# EAGLE board 13519-Serial-Basic.panel_v10 (EAGLE 7.5.0), part 1 of 6
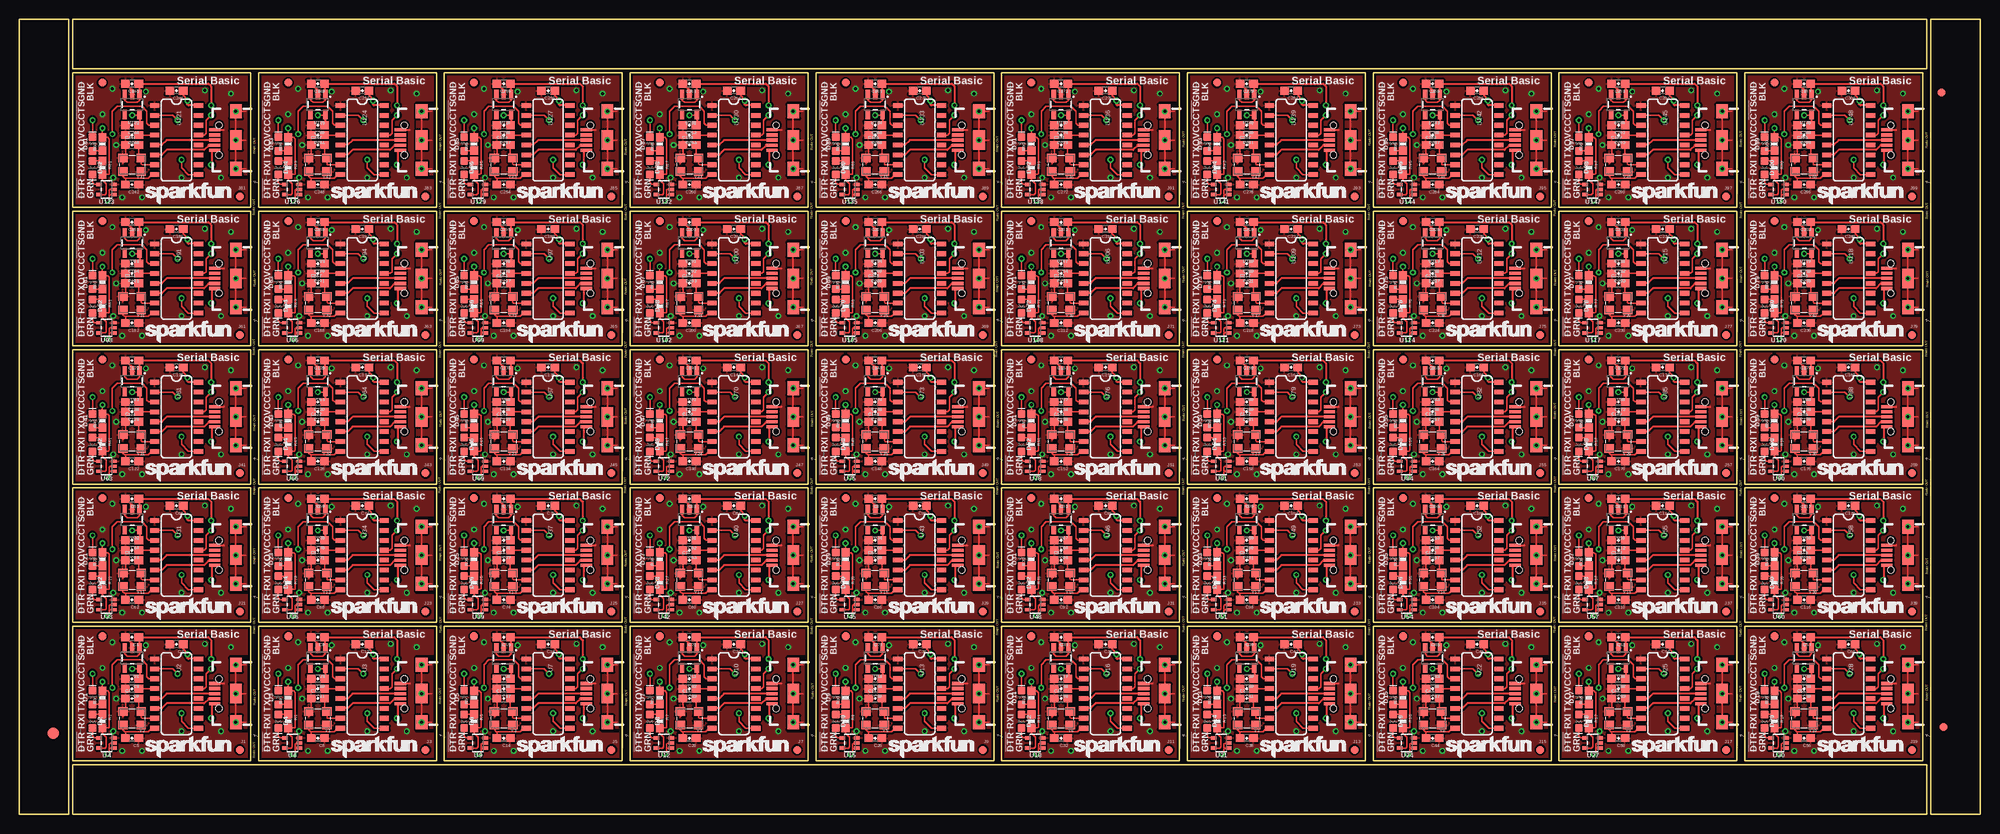
[diagram p0: board, top side]
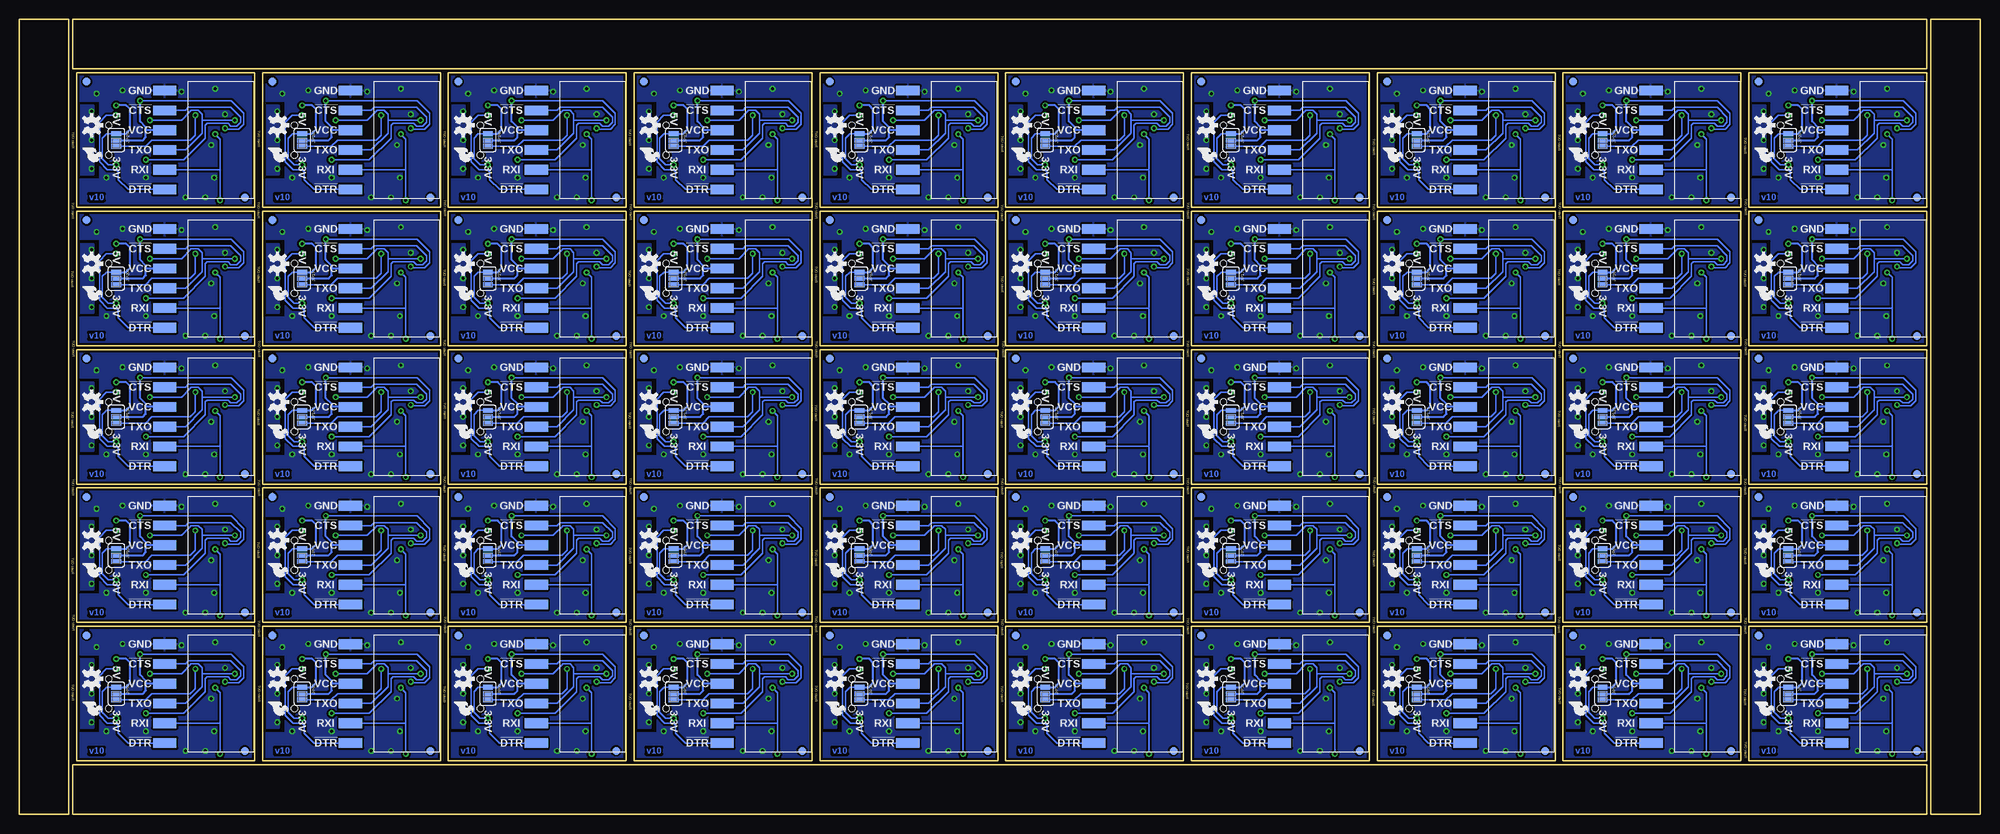
[diagram p1: board, bottom side, seen from below]

Size 251.97 x 102.11 mm. Coordinates in mm from the lower left corner, seen from the top.
Outline: 224 segments
Copper layers (1*16): Top 0.035mm / dielectric 1.5mm / Bottom 0.035mm
Design rules "SparkFun-2-layer-TIGHT": minimum track width 7mil, minimum drill 15mil, track to track 7mil, track to pad 7mil, pad to pad 7mil, via to via 7mil, smd to smd 7mil, copper to edge 7mil, drill to drill 7mil, minimum pad ring 7mil, minimum via ring 7mil, stop-mask expansion 4mil, vias tented up to drill 20mil, thermal gap 10mil
Net classes: 1 power: width 0.178 mm

## Footprints (pad centres in the part's own frame; a part is rotated, then mirrored left to right if it is on the bottom)
0603-CAP = smd 1.1 x 1: 1 -0.85,0; 2 0.85,0
LED-0603 = smd 1 x 1: A -0.877,0; C 0.877,0
FIDUCIAL-1.5X3 = smd 1.5 x 1.5: 1 0,0
FIDUCIAL-1X2 = smd 1 x 1: 1 0,0
USB-B-MICRO-SMD_V03 = smd 1.45 x 0.4: D+ 2.725,0; D- 2.725,0.65; GND 2.725,-1.3; ID 2.725,-0.65; VBUS 2.725,1.3 | smd 1.5 x 1.8: SHIELD1 0,3.685; SHIELD2 0,-3.685 | smd 1.5 x 2.5: SHIELD3 0,0 | hole 0.85: 2.2,1.9; 2.2,-1.9
1X06-SMD-FEMALE-V2 = smd 1.25 x 3: 1 6.35,3.425; 2 3.81,3.425; 3 1.27,3.425; 4 -1.27,3.425; 5 -3.81,3.425; 6 -6.35,3.425
PAD-JUMPER-3-2OF3_NC_BY_PASTE_YES_SILK_FULL_BOX = smd 0.635 x 1.27: 1 -0.813,0; 2 0,0; 3 0.813,0
0603-RES = smd 1.1 x 1: 1 -0.85,0; 2 0.85,0
SOT23-5 = smd 0.55 x 1.2: 1 -0.95,-1.3; 2 0,-1.3; 3 0.95,-1.3; 4 0.95,1.3; 5 -0.95,1.3
SO016 = smd 0.6 x 1.2: 1 -4.445,-2.8; 2 -3.175,-2.8; 3 -1.905,-2.8; 4 -0.635,-2.8; 5 0.635,-2.8; 6 1.905,-2.8; 7 3.175,-2.8; 8 4.445,-2.8; 9 4.445,2.8; 10 3.175,2.8; 11 1.905,2.8; 12 0.635,2.8; 13 -0.635,2.8; 14 -1.905,2.8; 15 -3.175,2.8; 16 -4.445,2.8
SOT353 = smd 0.42 x 0.7: 1 -0.65,-0.95; 2 0,-0.95; 3 0.65,-0.95; 4 0.65,0.95; 5 -0.65,0.95
CRYSTAL-SMD-3.2X2.5 = smd 1.2 x 1.1: 1 -1.175,-0.875; 2 1.175,-0.875; 3 1.175,0.875; 4 -1.175,0.875

## Placement (x,y rotation side)
C1  1.0uF  [0603-CAP]  14.48,22.73 180 top
C2  1.0uF  [0603-CAP]  14.48,17.4 180 top
C3  0.1uF  [0603-CAP]  20.19,21.84 180 top
C4  10pF  [0603-CAP]  14.48,14.86 0 top
C5  10pF  [0603-CAP]  14.48,9.78 180 top
C6  10nF  [0603-CAP]  14.48,16.13 180 top
C7  10pF  [0603-CAP]  38.35,14.86 0 top
C8  10pF  [0603-CAP]  38.35,9.78 180 top
C9  1.0uF  [0603-CAP]  38.35,22.73 180 top
C10  1.0uF  [0603-CAP]  38.35,17.4 180 top
C11  10nF  [0603-CAP]  38.35,16.13 180 top
C12  0.1uF  [0603-CAP]  44.07,21.84 180 top
C13  10pF  [0603-CAP]  62.23,14.86 0 top
C14  10pF  [0603-CAP]  62.23,9.78 180 top
C15  1.0uF  [0603-CAP]  62.23,22.73 180 top
C16  1.0uF  [0603-CAP]  62.23,17.4 180 top
C17  10nF  [0603-CAP]  62.23,16.13 180 top
C18  0.1uF  [0603-CAP]  67.94,21.84 180 top
C19  10pF  [0603-CAP]  86.11,14.86 0 top
C20  10pF  [0603-CAP]  86.11,9.78 180 top
C21  1.0uF  [0603-CAP]  86.11,22.73 180 top
C22  1.0uF  [0603-CAP]  86.11,17.4 180 top
C23  10nF  [0603-CAP]  86.11,16.13 180 top
C24  0.1uF  [0603-CAP]  91.82,21.84 180 top
C25  10pF  [0603-CAP]  109.98,14.86 0 top
C26  10pF  [0603-CAP]  109.98,9.78 180 top
C27  1.0uF  [0603-CAP]  109.98,22.73 180 top
C28  1.0uF  [0603-CAP]  109.98,17.4 180 top
C29  10nF  [0603-CAP]  109.98,16.13 180 top
C30  0.1uF  [0603-CAP]  115.7,21.84 180 top
C31  10pF  [0603-CAP]  133.86,14.86 0 top
C32  10pF  [0603-CAP]  133.86,9.78 180 top
C33  1.0uF  [0603-CAP]  133.86,22.73 180 top
C34  1.0uF  [0603-CAP]  133.86,17.4 180 top
C35  10nF  [0603-CAP]  133.86,16.13 180 top
C36  0.1uF  [0603-CAP]  139.57,21.84 180 top
C37  10pF  [0603-CAP]  157.73,14.86 0 top
C38  10pF  [0603-CAP]  157.73,9.78 180 top
C39  1.0uF  [0603-CAP]  157.73,22.73 180 top
C40  1.0uF  [0603-CAP]  157.73,17.4 180 top
C41  10nF  [0603-CAP]  157.73,16.13 180 top
C42  0.1uF  [0603-CAP]  163.45,21.84 180 top
C43  10pF  [0603-CAP]  181.61,14.86 0 top
C44  10pF  [0603-CAP]  181.61,9.78 180 top
C45  1.0uF  [0603-CAP]  181.61,22.73 180 top
C46  1.0uF  [0603-CAP]  181.61,17.4 180 top
C47  10nF  [0603-CAP]  181.61,16.13 180 top
C48  0.1uF  [0603-CAP]  187.32,21.84 180 top
C49  10pF  [0603-CAP]  205.49,14.86 0 top
C50  10pF  [0603-CAP]  205.49,9.78 180 top
C51  1.0uF  [0603-CAP]  205.49,22.73 180 top
C52  1.0uF  [0603-CAP]  205.49,17.4 180 top
C53  10nF  [0603-CAP]  205.49,16.13 180 top
C54  0.1uF  [0603-CAP]  211.2,21.84 180 top
C55  10pF  [0603-CAP]  229.36,14.86 0 top
C56  10pF  [0603-CAP]  229.36,9.78 180 top
C57  1.0uF  [0603-CAP]  229.36,22.73 180 top
C58  1.0uF  [0603-CAP]  229.36,17.4 180 top
C59  10nF  [0603-CAP]  229.36,16.13 180 top
C60  0.1uF  [0603-CAP]  235.08,21.84 180 top
C61  10pF  [0603-CAP]  14.48,32.64 0 top
C62  10pF  [0603-CAP]  14.48,27.56 180 top
C63  1.0uF  [0603-CAP]  14.48,40.51 180 top
C64  1.0uF  [0603-CAP]  14.48,35.18 180 top
C65  10nF  [0603-CAP]  14.48,33.91 180 top
C66  0.1uF  [0603-CAP]  20.19,39.62 180 top
C67  10pF  [0603-CAP]  38.35,32.64 0 top
C68  10pF  [0603-CAP]  38.35,27.56 180 top
C69  1.0uF  [0603-CAP]  38.35,40.51 180 top
C70  1.0uF  [0603-CAP]  38.35,35.18 180 top
C71  10nF  [0603-CAP]  38.35,33.91 180 top
C72  0.1uF  [0603-CAP]  44.07,39.62 180 top
C73  10pF  [0603-CAP]  62.23,32.64 0 top
C74  10pF  [0603-CAP]  62.23,27.56 180 top
C75  1.0uF  [0603-CAP]  62.23,40.51 180 top
C76  1.0uF  [0603-CAP]  62.23,35.18 180 top
C77  10nF  [0603-CAP]  62.23,33.91 180 top
C78  0.1uF  [0603-CAP]  67.94,39.62 180 top
C79  10pF  [0603-CAP]  86.11,32.64 0 top
C80  10pF  [0603-CAP]  86.11,27.56 180 top
C81  1.0uF  [0603-CAP]  86.11,40.51 180 top
C82  1.0uF  [0603-CAP]  86.11,35.18 180 top
C83  10nF  [0603-CAP]  86.11,33.91 180 top
C84  0.1uF  [0603-CAP]  91.82,39.62 180 top
C85  10pF  [0603-CAP]  109.98,32.64 0 top
C86  10pF  [0603-CAP]  109.98,27.56 180 top
C87  1.0uF  [0603-CAP]  109.98,40.51 180 top
C88  1.0uF  [0603-CAP]  109.98,35.18 180 top
C89  10nF  [0603-CAP]  109.98,33.91 180 top
C90  0.1uF  [0603-CAP]  115.7,39.62 180 top
C91  10pF  [0603-CAP]  133.86,32.64 0 top
C92  10pF  [0603-CAP]  133.86,27.56 180 top
C93  1.0uF  [0603-CAP]  133.86,40.51 180 top
C94  1.0uF  [0603-CAP]  133.86,35.18 180 top
C95  10nF  [0603-CAP]  133.86,33.91 180 top
C96  0.1uF  [0603-CAP]  139.57,39.62 180 top
C97  10pF  [0603-CAP]  157.73,32.64 0 top
C98  10pF  [0603-CAP]  157.73,27.56 180 top
C99  1.0uF  [0603-CAP]  157.73,40.51 180 top
C100  1.0uF  [0603-CAP]  157.73,35.18 180 top
C101  10nF  [0603-CAP]  157.73,33.91 180 top
C102  0.1uF  [0603-CAP]  163.45,39.62 180 top
C103  10pF  [0603-CAP]  181.61,32.64 0 top
C104  10pF  [0603-CAP]  181.61,27.56 180 top
C105  1.0uF  [0603-CAP]  181.61,40.51 180 top
C106  1.0uF  [0603-CAP]  181.61,35.18 180 top
C107  10nF  [0603-CAP]  181.61,33.91 180 top
C108  0.1uF  [0603-CAP]  187.32,39.62 180 top
C109  10pF  [0603-CAP]  205.49,32.64 0 top
C110  10pF  [0603-CAP]  205.49,27.56 180 top
C111  1.0uF  [0603-CAP]  205.49,40.51 180 top
C112  1.0uF  [0603-CAP]  205.49,35.18 180 top
C113  10nF  [0603-CAP]  205.49,33.91 180 top
C114  0.1uF  [0603-CAP]  211.2,39.62 180 top
C115  10pF  [0603-CAP]  229.36,32.64 0 top
C116  10pF  [0603-CAP]  229.36,27.56 180 top
C117  1.0uF  [0603-CAP]  229.36,40.51 180 top
C118  1.0uF  [0603-CAP]  229.36,35.18 180 top
C119  10nF  [0603-CAP]  229.36,33.91 180 top
C120  0.1uF  [0603-CAP]  235.08,39.62 180 top
C121  10pF  [0603-CAP]  14.48,50.42 0 top
C122  10pF  [0603-CAP]  14.48,45.34 180 top
C123  1.0uF  [0603-CAP]  14.48,58.29 180 top
C124  1.0uF  [0603-CAP]  14.48,52.96 180 top
C125  10nF  [0603-CAP]  14.48,51.69 180 top
C126  0.1uF  [0603-CAP]  20.19,57.4 180 top
C127  10pF  [0603-CAP]  38.35,50.42 0 top
C128  10pF  [0603-CAP]  38.35,45.34 180 top
C129  1.0uF  [0603-CAP]  38.35,58.29 180 top
C130  1.0uF  [0603-CAP]  38.35,52.96 180 top
C131  10nF  [0603-CAP]  38.35,51.69 180 top
C132  0.1uF  [0603-CAP]  44.07,57.4 180 top
C133  10pF  [0603-CAP]  62.23,50.42 0 top
C134  10pF  [0603-CAP]  62.23,45.34 180 top
C135  1.0uF  [0603-CAP]  62.23,58.29 180 top
C136  1.0uF  [0603-CAP]  62.23,52.96 180 top
C137  10nF  [0603-CAP]  62.23,51.69 180 top
C138  0.1uF  [0603-CAP]  67.94,57.4 180 top
C139  10pF  [0603-CAP]  86.11,50.42 0 top
C140  10pF  [0603-CAP]  86.11,45.34 180 top
C141  1.0uF  [0603-CAP]  86.11,58.29 180 top
C142  1.0uF  [0603-CAP]  86.11,52.96 180 top
C143  10nF  [0603-CAP]  86.11,51.69 180 top
C144  0.1uF  [0603-CAP]  91.82,57.4 180 top
C145  10pF  [0603-CAP]  109.98,50.42 0 top
C146  10pF  [0603-CAP]  109.98,45.34 180 top
C147  1.0uF  [0603-CAP]  109.98,58.29 180 top
C148  1.0uF  [0603-CAP]  109.98,52.96 180 top
C149  10nF  [0603-CAP]  109.98,51.69 180 top
C150  0.1uF  [0603-CAP]  115.7,57.4 180 top
C151  10pF  [0603-CAP]  133.86,50.42 0 top
C152  10pF  [0603-CAP]  133.86,45.34 180 top
C153  1.0uF  [0603-CAP]  133.86,58.29 180 top
C154  1.0uF  [0603-CAP]  133.86,52.96 180 top
C155  10nF  [0603-CAP]  133.86,51.69 180 top
C156  0.1uF  [0603-CAP]  139.57,57.4 180 top
C157  10pF  [0603-CAP]  157.73,50.42 0 top
C158  10pF  [0603-CAP]  157.73,45.34 180 top
C159  1.0uF  [0603-CAP]  157.73,58.29 180 top
C160  1.0uF  [0603-CAP]  157.73,52.96 180 top
C161  10nF  [0603-CAP]  157.73,51.69 180 top
C162  0.1uF  [0603-CAP]  163.45,57.4 180 top
C163  10pF  [0603-CAP]  181.61,50.42 0 top
C164  10pF  [0603-CAP]  181.61,45.34 180 top
C165  1.0uF  [0603-CAP]  181.61,58.29 180 top
C166  1.0uF  [0603-CAP]  181.61,52.96 180 top
C167  10nF  [0603-CAP]  181.61,51.69 180 top
C168  0.1uF  [0603-CAP]  187.32,57.4 180 top
C169  10pF  [0603-CAP]  205.49,50.42 0 top
C170  10pF  [0603-CAP]  205.49,45.34 180 top
C171  1.0uF  [0603-CAP]  205.49,58.29 180 top
C172  1.0uF  [0603-CAP]  205.49,52.96 180 top
C173  10nF  [0603-CAP]  205.49,51.69 180 top
C174  0.1uF  [0603-CAP]  211.2,57.4 180 top
C175  10pF  [0603-CAP]  229.36,50.42 0 top
C176  10pF  [0603-CAP]  229.36,45.34 180 top
C177  1.0uF  [0603-CAP]  229.36,58.29 180 top
C178  1.0uF  [0603-CAP]  229.36,52.96 180 top
C179  10nF  [0603-CAP]  229.36,51.69 180 top
C180  0.1uF  [0603-CAP]  235.08,57.4 180 top
C181  10pF  [0603-CAP]  14.48,68.2 0 top
C182  10pF  [0603-CAP]  14.48,63.12 180 top
C183  1.0uF  [0603-CAP]  14.48,76.07 180 top
C184  1.0uF  [0603-CAP]  14.48,70.74 180 top
C185  10nF  [0603-CAP]  14.48,69.47 180 top
C186  0.1uF  [0603-CAP]  20.19,75.18 180 top
C187  10pF  [0603-CAP]  38.35,68.2 0 top
C188  10pF  [0603-CAP]  38.35,63.12 180 top
C189  1.0uF  [0603-CAP]  38.35,76.07 180 top
C190  1.0uF  [0603-CAP]  38.35,70.74 180 top
C191  10nF  [0603-CAP]  38.35,69.47 180 top
C192  0.1uF  [0603-CAP]  44.07,75.18 180 top
C193  10pF  [0603-CAP]  62.23,68.2 0 top
C194  10pF  [0603-CAP]  62.23,63.12 180 top
C195  1.0uF  [0603-CAP]  62.23,76.07 180 top
C196  1.0uF  [0603-CAP]  62.23,70.74 180 top
C197  10nF  [0603-CAP]  62.23,69.47 180 top
C198  0.1uF  [0603-CAP]  67.94,75.18 180 top
C199  10pF  [0603-CAP]  86.11,68.2 0 top
C200  10pF  [0603-CAP]  86.11,63.12 180 top
C201  1.0uF  [0603-CAP]  86.11,76.07 180 top
C202  1.0uF  [0603-CAP]  86.11,70.74 180 top
C203  10nF  [0603-CAP]  86.11,69.47 180 top
C204  0.1uF  [0603-CAP]  91.82,75.18 180 top
C205  10pF  [0603-CAP]  109.98,68.2 0 top
C206  10pF  [0603-CAP]  109.98,63.12 180 top
C207  1.0uF  [0603-CAP]  109.98,76.07 180 top
C208  1.0uF  [0603-CAP]  109.98,70.74 180 top
C209  10nF  [0603-CAP]  109.98,69.47 180 top
C210  0.1uF  [0603-CAP]  115.7,75.18 180 top
C211  10pF  [0603-CAP]  133.86,68.2 0 top
C212  10pF  [0603-CAP]  133.86,63.12 180 top
C213  1.0uF  [0603-CAP]  133.86,76.07 180 top
C214  1.0uF  [0603-CAP]  133.86,70.74 180 top
C215  10nF  [0603-CAP]  133.86,69.47 180 top
C216  0.1uF  [0603-CAP]  139.57,75.18 180 top
C217  10pF  [0603-CAP]  157.73,68.2 0 top
C218  10pF  [0603-CAP]  157.73,63.12 180 top
C219  1.0uF  [0603-CAP]  157.73,76.07 180 top
C220  1.0uF  [0603-CAP]  157.73,70.74 180 top
C221  10nF  [0603-CAP]  157.73,69.47 180 top
C222  0.1uF  [0603-CAP]  163.45,75.18 180 top
C223  10pF  [0603-CAP]  181.61,68.2 0 top
C224  10pF  [0603-CAP]  181.61,63.12 180 top
C225  1.0uF  [0603-CAP]  181.61,76.07 180 top
C226  1.0uF  [0603-CAP]  181.61,70.74 180 top
C227  10nF  [0603-CAP]  181.61,69.47 180 top
C228  0.1uF  [0603-CAP]  187.32,75.18 180 top
C229  10pF  [0603-CAP]  205.49,68.2 0 top
C230  10pF  [0603-CAP]  205.49,63.12 180 top
C231  1.0uF  [0603-CAP]  205.49,76.07 180 top
C232  1.0uF  [0603-CAP]  205.49,70.74 180 top
C233  10nF  [0603-CAP]  205.49,69.47 180 top
C234  0.1uF  [0603-CAP]  211.2,75.18 180 top
C235  10pF  [0603-CAP]  229.36,68.2 0 top
C236  10pF  [0603-CAP]  229.36,63.12 180 top
C237  1.0uF  [0603-CAP]  229.36,76.07 180 top
C238  1.0uF  [0603-CAP]  229.36,70.74 180 top
C239  10nF  [0603-CAP]  229.36,69.47 180 top
C240  0.1uF  [0603-CAP]  235.08,75.18 180 top
C241  10pF  [0603-CAP]  14.48,85.98 0 top
C242  10pF  [0603-CAP]  14.48,80.9 180 top
C243  1.0uF  [0603-CAP]  14.48,93.85 180 top
C244  1.0uF  [0603-CAP]  14.48,88.52 180 top
C245  10nF  [0603-CAP]  14.48,87.25 180 top
C246  0.1uF  [0603-CAP]  20.19,92.96 180 top
C247  10pF  [0603-CAP]  38.35,85.98 0 top
C248  10pF  [0603-CAP]  38.35,80.9 180 top
C249  1.0uF  [0603-CAP]  38.35,93.85 180 top
C250  1.0uF  [0603-CAP]  38.35,88.52 180 top
C251  10nF  [0603-CAP]  38.35,87.25 180 top
C252  0.1uF  [0603-CAP]  44.07,92.96 180 top
C253  10pF  [0603-CAP]  62.23,85.98 0 top
C254  10pF  [0603-CAP]  62.23,80.9 180 top
C255  1.0uF  [0603-CAP]  62.23,93.85 180 top
C256  1.0uF  [0603-CAP]  62.23,88.52 180 top
C257  10nF  [0603-CAP]  62.23,87.25 180 top
C258  0.1uF  [0603-CAP]  67.94,92.96 180 top
C259  10pF  [0603-CAP]  86.11,85.98 0 top
C260  10pF  [0603-CAP]  86.11,80.9 180 top
C261  1.0uF  [0603-CAP]  86.11,93.85 180 top
C262  1.0uF  [0603-CAP]  86.11,88.52 180 top
C263  10nF  [0603-CAP]  86.11,87.25 180 top
C264  0.1uF  [0603-CAP]  91.82,92.96 180 top
C265  10pF  [0603-CAP]  109.98,85.98 0 top
C266  10pF  [0603-CAP]  109.98,80.9 180 top
C267  1.0uF  [0603-CAP]  109.98,93.85 180 top
C268  1.0uF  [0603-CAP]  109.98,88.52 180 top
C269  10nF  [0603-CAP]  109.98,87.25 180 top
C270  0.1uF  [0603-CAP]  115.7,92.96 180 top
C271  10pF  [0603-CAP]  133.86,85.98 0 top
C272  10pF  [0603-CAP]  133.86,80.9 180 top
C273  1.0uF  [0603-CAP]  133.86,93.85 180 top
C274  1.0uF  [0603-CAP]  133.86,88.52 180 top
C275  10nF  [0603-CAP]  133.86,87.25 180 top
C276  0.1uF  [0603-CAP]  139.57,92.96 180 top
C277  10pF  [0603-CAP]  157.73,85.98 0 top
C278  10pF  [0603-CAP]  157.73,80.9 180 top
C279  1.0uF  [0603-CAP]  157.73,93.85 180 top
C280  1.0uF  [0603-CAP]  157.73,88.52 180 top
C281  10nF  [0603-CAP]  157.73,87.25 180 top
C282  0.1uF  [0603-CAP]  163.45,92.96 180 top
C283  10pF  [0603-CAP]  181.61,85.98 0 top
C284  10pF  [0603-CAP]  181.61,80.9 180 top
C285  1.0uF  [0603-CAP]  181.61,93.85 180 top
C286  1.0uF  [0603-CAP]  181.61,88.52 180 top
C287  10nF  [0603-CAP]  181.61,87.25 180 top
C288  0.1uF  [0603-CAP]  187.32,92.96 180 top
C289  10pF  [0603-CAP]  205.49,85.98 0 top
C290  10pF  [0603-CAP]  205.49,80.9 180 top
C291  1.0uF  [0603-CAP]  205.49,93.85 180 top
C292  1.0uF  [0603-CAP]  205.49,88.52 180 top
C293  10nF  [0603-CAP]  205.49,87.25 180 top
C294  0.1uF  [0603-CAP]  211.2,92.96 180 top
C295  10pF  [0603-CAP]  229.36,85.98 0 top
C296  10pF  [0603-CAP]  229.36,80.9 180 top
C297  1.0uF  [0603-CAP]  229.36,93.85 180 top
C298  1.0uF  [0603-CAP]  229.36,88.52 180 top
C299  10nF  [0603-CAP]  229.36,87.25 180 top
C300  0.1uF  [0603-CAP]  235.08,92.96 180 top
D1  GREEN  [LED-0603]  9.4,14.99 90 top
D2  Yellow  [LED-0603]  9.4,11.94 270 top
D3  GREEN  [LED-0603]  33.27,14.99 90 top
D4  Yellow  [LED-0603]  33.27,11.94 270 top
D5  GREEN  [LED-0603]  57.15,14.99 90 top
D6  Yellow  [LED-0603]  57.15,11.94 270 top
D7  GREEN  [LED-0603]  81.03,14.99 90 top
D8  Yellow  [LED-0603]  81.03,11.94 270 top
D9  GREEN  [LED-0603]  104.9,14.99 90 top
D10  Yellow  [LED-0603]  104.9,11.94 270 top
D11  GREEN  [LED-0603]  128.78,14.99 90 top
D12  Yellow  [LED-0603]  128.78,11.94 270 top
D13  GREEN  [LED-0603]  152.65,14.99 90 top
D14  Yellow  [LED-0603]  152.65,11.94 270 top
D15  GREEN  [LED-0603]  176.53,14.99 90 top
D16  Yellow  [LED-0603]  176.53,11.94 270 top
D17  GREEN  [LED-0603]  200.41,14.99 90 top
D18  Yellow  [LED-0603]  200.41,11.94 270 top
D19  GREEN  [LED-0603]  224.28,14.99 90 top
D20  Yellow  [LED-0603]  224.28,11.94 270 top
D21  GREEN  [LED-0603]  9.4,32.77 90 top
D22  Yellow  [LED-0603]  9.4,29.72 270 top
D23  GREEN  [LED-0603]  33.27,32.77 90 top
D24  Yellow  [LED-0603]  33.27,29.72 270 top
D25  GREEN  [LED-0603]  57.15,32.77 90 top
D26  Yellow  [LED-0603]  57.15,29.72 270 top
D27  GREEN  [LED-0603]  81.03,32.77 90 top
D28  Yellow  [LED-0603]  81.03,29.72 270 top
D29  GREEN  [LED-0603]  104.9,32.77 90 top
D30  Yellow  [LED-0603]  104.9,29.72 270 top
D31  GREEN  [LED-0603]  128.78,32.77 90 top
D32  Yellow  [LED-0603]  128.78,29.72 270 top
D33  GREEN  [LED-0603]  152.65,32.77 90 top
D34  Yellow  [LED-0603]  152.65,29.72 270 top
D35  GREEN  [LED-0603]  176.53,32.77 90 top
D36  Yellow  [LED-0603]  176.53,29.72 270 top
D37  GREEN  [LED-0603]  200.41,32.77 90 top
D38  Yellow  [LED-0603]  200.41,29.72 270 top
D39  GREEN  [LED-0603]  224.28,32.77 90 top
D40  Yellow  [LED-0603]  224.28,29.72 270 top
D41  GREEN  [LED-0603]  9.4,50.55 90 top
D42  Yellow  [LED-0603]  9.4,47.5 270 top
D43  GREEN  [LED-0603]  33.27,50.55 90 top
D44  Yellow  [LED-0603]  33.27,47.5 270 top
D45  GREEN  [LED-0603]  57.15,50.55 90 top
D46  Yellow  [LED-0603]  57.15,47.5 270 top
D47  GREEN  [LED-0603]  81.03,50.55 90 top
D48  Yellow  [LED-0603]  81.03,47.5 270 top
D49  GREEN  [LED-0603]  104.9,50.55 90 top
D50  Yellow  [LED-0603]  104.9,47.5 270 top
D51  GREEN  [LED-0603]  128.78,50.55 90 top
D52  Yellow  [LED-0603]  128.78,47.5 270 top
D53  GREEN  [LED-0603]  152.65,50.55 90 top
D54  Yellow  [LED-0603]  152.65,47.5 270 top
D55  GREEN  [LED-0603]  176.53,50.55 90 top
D56  Yellow  [LED-0603]  176.53,47.5 270 top
D57  GREEN  [LED-0603]  200.41,50.55 90 top
D58  Yellow  [LED-0603]  200.41,47.5 270 top
D59  GREEN  [LED-0603]  224.28,50.55 90 top
D60  Yellow  [LED-0603]  224.28,47.5 270 top
D61  GREEN  [LED-0603]  9.4,68.33 90 top
D62  Yellow  [LED-0603]  9.4,65.28 270 top
D63  GREEN  [LED-0603]  33.27,68.33 90 top
D64  Yellow  [LED-0603]  33.27,65.28 270 top
D65  GREEN  [LED-0603]  57.15,68.33 90 top
D66  Yellow  [LED-0603]  57.15,65.28 270 top
D67  GREEN  [LED-0603]  81.03,68.33 90 top
D68  Yellow  [LED-0603]  81.03,65.28 270 top
D69  GREEN  [LED-0603]  104.9,68.33 90 top
D70  Yellow  [LED-0603]  104.9,65.28 270 top
D71  GREEN  [LED-0603]  128.78,68.33 90 top
D72  Yellow  [LED-0603]  128.78,65.28 270 top
D73  GREEN  [LED-0603]  152.65,68.33 90 top
D74  Yellow  [LED-0603]  152.65,65.28 270 top
D75  GREEN  [LED-0603]  176.53,68.33 90 top
D76  Yellow  [LED-0603]  176.53,65.28 270 top
D77  GREEN  [LED-0603]  200.41,68.33 90 top
D78  Yellow  [LED-0603]  200.41,65.28 270 top
D79  GREEN  [LED-0603]  224.28,68.33 90 top
D80  Yellow  [LED-0603]  224.28,65.28 270 top
D81  GREEN  [LED-0603]  9.4,86.11 90 top
D82  Yellow  [LED-0603]  9.4,83.06 270 top
D83  GREEN  [LED-0603]  33.27,86.11 90 top
D84  Yellow  [LED-0603]  33.27,83.06 270 top
D85  GREEN  [LED-0603]  57.15,86.11 90 top
D86  Yellow  [LED-0603]  57.15,83.06 270 top
D87  GREEN  [LED-0603]  81.03,86.11 90 top
D88  Yellow  [LED-0603]  81.03,83.06 270 top
D89  GREEN  [LED-0603]  104.9,86.11 90 top
D90  Yellow  [LED-0603]  104.9,83.06 270 top
D91  GREEN  [LED-0603]  128.78,86.11 90 top
D92  Yellow  [LED-0603]  128.78,83.06 270 top
D93  GREEN  [LED-0603]  152.65,86.11 90 top
D94  Yellow  [LED-0603]  152.65,83.06 270 top
D95  GREEN  [LED-0603]  176.53,86.11 90 top
D96  Yellow  [LED-0603]  176.53,83.06 270 top
D97  GREEN  [LED-0603]  200.41,86.11 90 top
D98  Yellow  [LED-0603]  200.41,83.06 270 top
D99  GREEN  [LED-0603]  224.28,86.11 90 top
D100  Yellow  [LED-0603]  224.28,83.06 270 top
E$1  [FIDUCIAL-1.5X3]  4.32,10.41 0 top
E$5  [FIDUCIAL-1X2]  247.01,92.71 180 top
E$6  [FIDUCIAL-1X2]  247.27,11.18 0 top
J1  microB  [USB-B-MICRO-SMD_V03]  27.81,15.49 180 top
J2  [1X06-SMD-FEMALE-V2]  14.99,15.49 90 bottom
J3  microB  [USB-B-MICRO-SMD_V03]  51.69,15.49 180 top
J4  [1X06-SMD-FEMALE-V2]  38.86,15.49 90 bottom
J5  microB  [USB-B-MICRO-SMD_V03]  75.56,15.49 180 top
J6  [1X06-SMD-FEMALE-V2]  62.74,15.49 90 bottom
J7  microB  [USB-B-MICRO-SMD_V03]  99.44,15.49 180 top
J8  [1X06-SMD-FEMALE-V2]  86.61,15.49 90 bottom
J9  microB  [USB-B-MICRO-SMD_V03]  123.32,15.49 180 top
J10  [1X06-SMD-FEMALE-V2]  110.49,15.49 90 bottom
J11  microB  [USB-B-MICRO-SMD_V03]  147.19,15.49 180 top
J12  [1X06-SMD-FEMALE-V2]  134.37,15.49 90 bottom
J13  microB  [USB-B-MICRO-SMD_V03]  171.07,15.49 180 top
J14  [1X06-SMD-FEMALE-V2]  158.24,15.49 90 bottom
J15  microB  [USB-B-MICRO-SMD_V03]  194.94,15.49 180 top
J16  [1X06-SMD-FEMALE-V2]  182.12,15.49 90 bottom
J17  microB  [USB-B-MICRO-SMD_V03]  218.82,15.49 180 top
J18  [1X06-SMD-FEMALE-V2]  205.99,15.49 90 bottom
J19  microB  [USB-B-MICRO-SMD_V03]  242.7,15.49 180 top
J20  [1X06-SMD-FEMALE-V2]  229.87,15.49 90 bottom
J21  microB  [USB-B-MICRO-SMD_V03]  27.81,33.27 180 top
J22  [1X06-SMD-FEMALE-V2]  14.99,33.27 90 bottom
J23  microB  [USB-B-MICRO-SMD_V03]  51.69,33.27 180 top
J24  [1X06-SMD-FEMALE-V2]  38.86,33.27 90 bottom
J25  microB  [USB-B-MICRO-SMD_V03]  75.56,33.27 180 top
J26  [1X06-SMD-FEMALE-V2]  62.74,33.27 90 bottom
J27  microB  [USB-B-MICRO-SMD_V03]  99.44,33.27 180 top
J28  [1X06-SMD-FEMALE-V2]  86.61,33.27 90 bottom
J29  microB  [USB-B-MICRO-SMD_V03]  123.32,33.27 180 top
J30  [1X06-SMD-FEMALE-V2]  110.49,33.27 90 bottom
J31  microB  [USB-B-MICRO-SMD_V03]  147.19,33.27 180 top
J32  [1X06-SMD-FEMALE-V2]  134.37,33.27 90 bottom
J33  microB  [USB-B-MICRO-SMD_V03]  171.07,33.27 180 top
J34  [1X06-SMD-FEMALE-V2]  158.24,33.27 90 bottom
J35  microB  [USB-B-MICRO-SMD_V03]  194.94,33.27 180 top
J36  [1X06-SMD-FEMALE-V2]  182.12,33.27 90 bottom
J37  microB  [USB-B-MICRO-SMD_V03]  218.82,33.27 180 top
J38  [1X06-SMD-FEMALE-V2]  205.99,33.27 90 bottom
J39  microB  [USB-B-MICRO-SMD_V03]  242.7,33.27 180 top
J40  [1X06-SMD-FEMALE-V2]  229.87,33.27 90 bottom
J41  microB  [USB-B-MICRO-SMD_V03]  27.81,51.05 180 top
J42  [1X06-SMD-FEMALE-V2]  14.99,51.05 90 bottom
J43  microB  [USB-B-MICRO-SMD_V03]  51.69,51.05 180 top
J44  [1X06-SMD-FEMALE-V2]  38.86,51.05 90 bottom
J45  microB  [USB-B-MICRO-SMD_V03]  75.56,51.05 180 top
J46  [1X06-SMD-FEMALE-V2]  62.74,51.05 90 bottom
J47  microB  [USB-B-MICRO-SMD_V03]  99.44,51.05 180 top
J48  [1X06-SMD-FEMALE-V2]  86.61,51.05 90 bottom
J49  microB  [USB-B-MICRO-SMD_V03]  123.32,51.05 180 top
J50  [1X06-SMD-FEMALE-V2]  110.49,51.05 90 bottom
J51  microB  [USB-B-MICRO-SMD_V03]  147.19,51.05 180 top
J52  [1X06-SMD-FEMALE-V2]  134.37,51.05 90 bottom
J53  microB  [USB-B-MICRO-SMD_V03]  171.07,51.05 180 top
J54  [1X06-SMD-FEMALE-V2]  158.24,51.05 90 bottom
J55  microB  [USB-B-MICRO-SMD_V03]  194.94,51.05 180 top
J56  [1X06-SMD-FEMALE-V2]  182.12,51.05 90 bottom
J57  microB  [USB-B-MICRO-SMD_V03]  218.82,51.05 180 top
J58  [1X06-SMD-FEMALE-V2]  205.99,51.05 90 bottom
J59  microB  [USB-B-MICRO-SMD_V03]  242.7,51.05 180 top
J60  [1X06-SMD-FEMALE-V2]  229.87,51.05 90 bottom
J61  microB  [USB-B-MICRO-SMD_V03]  27.81,68.83 180 top
J62  [1X06-SMD-FEMALE-V2]  14.99,68.83 90 bottom
J63  microB  [USB-B-MICRO-SMD_V03]  51.69,68.83 180 top
J64  [1X06-SMD-FEMALE-V2]  38.86,68.83 90 bottom
J65  microB  [USB-B-MICRO-SMD_V03]  75.56,68.83 180 top
J66  [1X06-SMD-FEMALE-V2]  62.74,68.83 90 bottom
J67  microB  [USB-B-MICRO-SMD_V03]  99.44,68.83 180 top
J68  [1X06-SMD-FEMALE-V2]  86.61,68.83 90 bottom
J69  microB  [USB-B-MICRO-SMD_V03]  123.32,68.83 180 top
J70  [1X06-SMD-FEMALE-V2]  110.49,68.83 90 bottom
J71  microB  [USB-B-MICRO-SMD_V03]  147.19,68.83 180 top
J72  [1X06-SMD-FEMALE-V2]  134.37,68.83 90 bottom
J73  microB  [USB-B-MICRO-SMD_V03]  171.07,68.83 180 top
J74  [1X06-SMD-FEMALE-V2]  158.24,68.83 90 bottom
J75  microB  [USB-B-MICRO-SMD_V03]  194.94,68.83 180 top
J76  [1X06-SMD-FEMALE-V2]  182.12,68.83 90 bottom
J77  microB  [USB-B-MICRO-SMD_V03]  218.82,68.83 180 top
J78  [1X06-SMD-FEMALE-V2]  205.99,68.83 90 bottom
J79  microB  [USB-B-MICRO-SMD_V03]  242.7,68.83 180 top
J80  [1X06-SMD-FEMALE-V2]  229.87,68.83 90 bottom
J81  microB  [USB-B-MICRO-SMD_V03]  27.81,86.61 180 top
J82  [1X06-SMD-FEMALE-V2]  14.99,86.61 90 bottom
J83  microB  [USB-B-MICRO-SMD_V03]  51.69,86.61 180 top
J84  [1X06-SMD-FEMALE-V2]  38.86,86.61 90 bottom
J85  microB  [USB-B-MICRO-SMD_V03]  75.56,86.61 180 top
J86  [1X06-SMD-FEMALE-V2]  62.74,86.61 90 bottom
J87  microB  [USB-B-MICRO-SMD_V03]  99.44,86.61 180 top
J88  [1X06-SMD-FEMALE-V2]  86.61,86.61 90 bottom
J89  microB  [USB-B-MICRO-SMD_V03]  123.32,86.61 180 top
J90  [1X06-SMD-FEMALE-V2]  110.49,86.61 90 bottom
J91  microB  [USB-B-MICRO-SMD_V03]  147.19,86.61 180 top
J92  [1X06-SMD-FEMALE-V2]  134.37,86.61 90 bottom
J93  microB  [USB-B-MICRO-SMD_V03]  171.07,86.61 180 top
J94  [1X06-SMD-FEMALE-V2]  158.24,86.61 90 bottom
J95  microB  [USB-B-MICRO-SMD_V03]  194.94,86.61 180 top
J96  [1X06-SMD-FEMALE-V2]  182.12,86.61 90 bottom
J97  microB  [USB-B-MICRO-SMD_V03]  218.82,86.61 180 top
J98  [1X06-SMD-FEMALE-V2]  205.99,86.61 90 bottom
J99  microB  [USB-B-MICRO-SMD_V03]  242.7,86.61 180 top
J100  [1X06-SMD-FEMALE-V2]  229.87,86.61 90 bottom
JP1  [PAD-JUMPER-3-2OF3_NC_BY_PASTE_YES_SILK_FULL_BOX]  24.64,15.49 270 bottom
JP2  FIDUCIAL1X2  [FIDUCIAL-1X2]  34.54,22.86 0 top
JP3  FIDUCIAL1X2  [FIDUCIAL-1X2]  10.67,22.86 0 top
JP4  FIDUCIAL1X2  [FIDUCIAL-1X2]  28.32,8.26 0 top
JP5  FIDUCIAL1X2  [FIDUCIAL-1X2]  8.13,8.13 0 bottom
JP6  FIDUCIAL1X2  [FIDUCIAL-1X2]  28.45,22.99 0 bottom
JP7  FIDUCIAL1X2  [FIDUCIAL-1X2]  52.2,8.26 0 top
JP8  FIDUCIAL1X2  [FIDUCIAL-1X2]  32,8.13 0 bottom
JP9  FIDUCIAL1X2  [FIDUCIAL-1X2]  52.32,22.99 0 bottom
JP10  [PAD-JUMPER-3-2OF3_NC_BY_PASTE_YES_SILK_FULL_BOX]  48.51,15.49 270 bottom
JP11  FIDUCIAL1X2  [FIDUCIAL-1X2]  58.42,22.86 0 top
JP12  FIDUCIAL1X2  [FIDUCIAL-1X2]  76.07,8.26 0 top
JP13  FIDUCIAL1X2  [FIDUCIAL-1X2]  55.88,8.13 0 bottom
JP14  FIDUCIAL1X2  [FIDUCIAL-1X2]  76.2,22.99 0 bottom
JP15  [PAD-JUMPER-3-2OF3_NC_BY_PASTE_YES_SILK_FULL_BOX]  72.39,15.49 270 bottom
JP16  FIDUCIAL1X2  [FIDUCIAL-1X2]  82.3,22.86 0 top
JP17  FIDUCIAL1X2  [FIDUCIAL-1X2]  99.95,8.26 0 top
JP18  FIDUCIAL1X2  [FIDUCIAL-1X2]  79.76,8.13 0 bottom
JP19  FIDUCIAL1X2  [FIDUCIAL-1X2]  100.08,22.99 0 bottom
JP20  [PAD-JUMPER-3-2OF3_NC_BY_PASTE_YES_SILK_FULL_BOX]  96.27,15.49 270 bottom
JP21  FIDUCIAL1X2  [FIDUCIAL-1X2]  106.17,22.86 0 top
JP22  FIDUCIAL1X2  [FIDUCIAL-1X2]  123.83,8.26 0 top
JP23  FIDUCIAL1X2  [FIDUCIAL-1X2]  103.63,8.13 0 bottom
JP24  FIDUCIAL1X2  [FIDUCIAL-1X2]  123.95,22.99 0 bottom
JP25  [PAD-JUMPER-3-2OF3_NC_BY_PASTE_YES_SILK_FULL_BOX]  120.14,15.49 270 bottom
JP26  FIDUCIAL1X2  [FIDUCIAL-1X2]  130.05,22.86 0 top
JP27  FIDUCIAL1X2  [FIDUCIAL-1X2]  147.7,8.26 0 top
JP28  FIDUCIAL1X2  [FIDUCIAL-1X2]  127.51,8.13 0 bottom
JP29  FIDUCIAL1X2  [FIDUCIAL-1X2]  147.83,22.99 0 bottom
JP30  [PAD-JUMPER-3-2OF3_NC_BY_PASTE_YES_SILK_FULL_BOX]  144.02,15.49 270 bottom
JP31  FIDUCIAL1X2  [FIDUCIAL-1X2]  153.92,22.86 0 top
JP32  FIDUCIAL1X2  [FIDUCIAL-1X2]  171.58,8.26 0 top
JP33  FIDUCIAL1X2  [FIDUCIAL-1X2]  151.38,8.13 0 bottom
JP34  FIDUCIAL1X2  [FIDUCIAL-1X2]  171.7,22.99 0 bottom
JP35  [PAD-JUMPER-3-2OF3_NC_BY_PASTE_YES_SILK_FULL_BOX]  167.89,15.49 270 bottom
JP36  FIDUCIAL1X2  [FIDUCIAL-1X2]  177.8,22.86 0 top
JP37  FIDUCIAL1X2  [FIDUCIAL-1X2]  195.45,8.26 0 top
JP38  FIDUCIAL1X2  [FIDUCIAL-1X2]  175.26,8.13 0 bottom
JP39  FIDUCIAL1X2  [FIDUCIAL-1X2]  195.58,22.99 0 bottom
JP40  [PAD-JUMPER-3-2OF3_NC_BY_PASTE_YES_SILK_FULL_BOX]  191.77,15.49 270 bottom
JP41  FIDUCIAL1X2  [FIDUCIAL-1X2]  201.68,22.86 0 top
JP42  FIDUCIAL1X2  [FIDUCIAL-1X2]  219.33,8.26 0 top
JP43  FIDUCIAL1X2  [FIDUCIAL-1X2]  199.14,8.13 0 bottom
JP44  FIDUCIAL1X2  [FIDUCIAL-1X2]  219.46,22.99 0 bottom
JP45  [PAD-JUMPER-3-2OF3_NC_BY_PASTE_YES_SILK_FULL_BOX]  215.65,15.49 270 bottom
JP46  FIDUCIAL1X2  [FIDUCIAL-1X2]  225.55,22.86 0 top
JP47  FIDUCIAL1X2  [FIDUCIAL-1X2]  243.21,8.26 0 top
JP48  FIDUCIAL1X2  [FIDUCIAL-1X2]  223.01,8.13 0 bottom
JP49  FIDUCIAL1X2  [FIDUCIAL-1X2]  243.33,22.99 0 bottom
JP50  [PAD-JUMPER-3-2OF3_NC_BY_PASTE_YES_SILK_FULL_BOX]  239.52,15.49 270 bottom
JP51  FIDUCIAL1X2  [FIDUCIAL-1X2]  10.67,40.64 0 top
JP52  FIDUCIAL1X2  [FIDUCIAL-1X2]  28.32,26.04 0 top
JP53  FIDUCIAL1X2  [FIDUCIAL-1X2]  8.13,25.91 0 bottom
JP54  FIDUCIAL1X2  [FIDUCIAL-1X2]  28.45,40.77 0 bottom
JP55  [PAD-JUMPER-3-2OF3_NC_BY_PASTE_YES_SILK_FULL_BOX]  24.64,33.27 270 bottom
JP56  FIDUCIAL1X2  [FIDUCIAL-1X2]  34.54,40.64 0 top
JP57  FIDUCIAL1X2  [FIDUCIAL-1X2]  52.2,26.04 0 top
JP58  FIDUCIAL1X2  [FIDUCIAL-1X2]  32,25.91 0 bottom
JP59  FIDUCIAL1X2  [FIDUCIAL-1X2]  52.32,40.77 0 bottom
JP60  [PAD-JUMPER-3-2OF3_NC_BY_PASTE_YES_SILK_FULL_BOX]  48.51,33.27 270 bottom
JP61  FIDUCIAL1X2  [FIDUCIAL-1X2]  58.42,40.64 0 top
JP62  FIDUCIAL1X2  [FIDUCIAL-1X2]  76.07,26.04 0 top
JP63  FIDUCIAL1X2  [FIDUCIAL-1X2]  55.88,25.91 0 bottom
JP64  FIDUCIAL1X2  [FIDUCIAL-1X2]  76.2,40.77 0 bottom
JP65  [PAD-JUMPER-3-2OF3_NC_BY_PASTE_YES_SILK_FULL_BOX]  72.39,33.27 270 bottom
JP66  FIDUCIAL1X2  [FIDUCIAL-1X2]  82.3,40.64 0 top
JP67  FIDUCIAL1X2  [FIDUCIAL-1X2]  99.95,26.04 0 top
JP68  FIDUCIAL1X2  [FIDUCIAL-1X2]  79.76,25.91 0 bottom
JP69  FIDUCIAL1X2  [FIDUCIAL-1X2]  100.08,40.77 0 bottom
JP70  [PAD-JUMPER-3-2OF3_NC_BY_PASTE_YES_SILK_FULL_BOX]  96.27,33.27 270 bottom
JP71  FIDUCIAL1X2  [FIDUCIAL-1X2]  106.17,40.64 0 top
JP72  FIDUCIAL1X2  [FIDUCIAL-1X2]  123.83,26.04 0 top
JP73  FIDUCIAL1X2  [FIDUCIAL-1X2]  103.63,25.91 0 bottom
JP74  FIDUCIAL1X2  [FIDUCIAL-1X2]  123.95,40.77 0 bottom
JP75  [PAD-JUMPER-3-2OF3_NC_BY_PASTE_YES_SILK_FULL_BOX]  120.14,33.27 270 bottom
JP76  FIDUCIAL1X2  [FIDUCIAL-1X2]  130.05,40.64 0 top
JP77  FIDUCIAL1X2  [FIDUCIAL-1X2]  147.7,26.04 0 top
JP78  FIDUCIAL1X2  [FIDUCIAL-1X2]  127.51,25.91 0 bottom
JP79  FIDUCIAL1X2  [FIDUCIAL-1X2]  147.83,40.77 0 bottom
JP80  [PAD-JUMPER-3-2OF3_NC_BY_PASTE_YES_SILK_FULL_BOX]  144.02,33.27 270 bottom
JP81  FIDUCIAL1X2  [FIDUCIAL-1X2]  153.92,40.64 0 top
JP82  FIDUCIAL1X2  [FIDUCIAL-1X2]  171.58,26.04 0 top
JP83  FIDUCIAL1X2  [FIDUCIAL-1X2]  151.38,25.91 0 bottom
JP84  FIDUCIAL1X2  [FIDUCIAL-1X2]  171.7,40.77 0 bottom
JP85  [PAD-JUMPER-3-2OF3_NC_BY_PASTE_YES_SILK_FULL_BOX]  167.89,33.27 270 bottom
JP86  FIDUCIAL1X2  [FIDUCIAL-1X2]  177.8,40.64 0 top
JP87  FIDUCIAL1X2  [FIDUCIAL-1X2]  195.45,26.04 0 top
JP88  FIDUCIAL1X2  [FIDUCIAL-1X2]  175.26,25.91 0 bottom
JP89  FIDUCIAL1X2  [FIDUCIAL-1X2]  195.58,40.77 0 bottom
JP90  [PAD-JUMPER-3-2OF3_NC_BY_PASTE_YES_SILK_FULL_BOX]  191.77,33.27 270 bottom
JP91  FIDUCIAL1X2  [FIDUCIAL-1X2]  201.68,40.64 0 top
JP92  FIDUCIAL1X2  [FIDUCIAL-1X2]  219.33,26.04 0 top
JP93  FIDUCIAL1X2  [FIDUCIAL-1X2]  199.14,25.91 0 bottom
JP94  FIDUCIAL1X2  [FIDUCIAL-1X2]  219.46,40.77 0 bottom
JP95  [PAD-JUMPER-3-2OF3_NC_BY_PASTE_YES_SILK_FULL_BOX]  215.65,33.27 270 bottom
JP96  FIDUCIAL1X2  [FIDUCIAL-1X2]  225.55,40.64 0 top
JP97  FIDUCIAL1X2  [FIDUCIAL-1X2]  243.21,26.04 0 top
JP98  FIDUCIAL1X2  [FIDUCIAL-1X2]  223.01,25.91 0 bottom
JP99  FIDUCIAL1X2  [FIDUCIAL-1X2]  243.33,40.77 0 bottom
JP100  [PAD-JUMPER-3-2OF3_NC_BY_PASTE_YES_SILK_FULL_BOX]  239.52,33.27 270 bottom
JP101  FIDUCIAL1X2  [FIDUCIAL-1X2]  10.67,58.42 0 top
JP102  FIDUCIAL1X2  [FIDUCIAL-1X2]  28.32,43.81 0 top
JP103  FIDUCIAL1X2  [FIDUCIAL-1X2]  8.13,43.69 0 bottom
JP104  FIDUCIAL1X2  [FIDUCIAL-1X2]  28.45,58.55 0 bottom
JP105  [PAD-JUMPER-3-2OF3_NC_BY_PASTE_YES_SILK_FULL_BOX]  24.64,51.05 270 bottom
JP106  FIDUCIAL1X2  [FIDUCIAL-1X2]  34.54,58.42 0 top
JP107  FIDUCIAL1X2  [FIDUCIAL-1X2]  52.2,43.81 0 top
JP108  FIDUCIAL1X2  [FIDUCIAL-1X2]  32,43.69 0 bottom
JP109  FIDUCIAL1X2  [FIDUCIAL-1X2]  52.32,58.55 0 bottom
JP110  [PAD-JUMPER-3-2OF3_NC_BY_PASTE_YES_SILK_FULL_BOX]  48.51,51.05 270 bottom
JP111  FIDUCIAL1X2  [FIDUCIAL-1X2]  58.42,58.42 0 top
JP112  FIDUCIAL1X2  [FIDUCIAL-1X2]  76.07,43.81 0 top
JP113  FIDUCIAL1X2  [FIDUCIAL-1X2]  55.88,43.69 0 bottom
JP114  FIDUCIAL1X2  [FIDUCIAL-1X2]  76.2,58.55 0 bottom
JP115  [PAD-JUMPER-3-2OF3_NC_BY_PASTE_YES_SILK_FULL_BOX]  72.39,51.05 270 bottom
JP116  FIDUCIAL1X2  [FIDUCIAL-1X2]  82.3,58.42 0 top
JP117  FIDUCIAL1X2  [FIDUCIAL-1X2]  99.95,43.81 0 top
JP118  FIDUCIAL1X2  [FIDUCIAL-1X2]  79.76,43.69 0 bottom
JP119  FIDUCIAL1X2  [FIDUCIAL-1X2]  100.08,58.55 0 bottom
JP120  [PAD-JUMPER-3-2OF3_NC_BY_PASTE_YES_SILK_FULL_BOX]  96.27,51.05 270 bottom
JP121  FIDUCIAL1X2  [FIDUCIAL-1X2]  106.17,58.42 0 top
JP122  FIDUCIAL1X2  [FIDUCIAL-1X2]  123.83,43.81 0 top
JP123  FIDUCIAL1X2  [FIDUCIAL-1X2]  103.63,43.69 0 bottom
JP124  FIDUCIAL1X2  [FIDUCIAL-1X2]  123.95,58.55 0 bottom
JP125  [PAD-JUMPER-3-2OF3_NC_BY_PASTE_YES_SILK_FULL_BOX]  120.14,51.05 270 bottom
JP126  FIDUCIAL1X2  [FIDUCIAL-1X2]  130.05,58.42 0 top
JP127  FIDUCIAL1X2  [FIDUCIAL-1X2]  147.7,43.81 0 top
JP128  FIDUCIAL1X2  [FIDUCIAL-1X2]  127.51,43.69 0 bottom
JP129  FIDUCIAL1X2  [FIDUCIAL-1X2]  147.83,58.55 0 bottom
JP130  [PAD-JUMPER-3-2OF3_NC_BY_PASTE_YES_SILK_FULL_BOX]  144.02,51.05 270 bottom
JP131  FIDUCIAL1X2  [FIDUCIAL-1X2]  153.92,58.42 0 top
JP132  FIDUCIAL1X2  [FIDUCIAL-1X2]  171.58,43.81 0 top
JP133  FIDUCIAL1X2  [FIDUCIAL-1X2]  151.38,43.69 0 bottom
JP134  FIDUCIAL1X2  [FIDUCIAL-1X2]  171.7,58.55 0 bottom
JP135  [PAD-JUMPER-3-2OF3_NC_BY_PASTE_YES_SILK_FULL_BOX]  167.89,51.05 270 bottom
JP136  FIDUCIAL1X2  [FIDUCIAL-1X2]  177.8,58.42 0 top
JP137  FIDUCIAL1X2  [FIDUCIAL-1X2]  195.45,43.81 0 top
JP138  FIDUCIAL1X2  [FIDUCIAL-1X2]  175.26,43.69 0 bottom
JP139  FIDUCIAL1X2  [FIDUCIAL-1X2]  195.58,58.55 0 bottom
JP140  [PAD-JUMPER-3-2OF3_NC_BY_PASTE_YES_SILK_FULL_BOX]  191.77,51.05 270 bottom
JP141  FIDUCIAL1X2  [FIDUCIAL-1X2]  201.68,58.42 0 top
JP142  FIDUCIAL1X2  [FIDUCIAL-1X2]  219.33,43.81 0 top
JP143  FIDUCIAL1X2  [FIDUCIAL-1X2]  199.14,43.69 0 bottom
JP144  FIDUCIAL1X2  [FIDUCIAL-1X2]  219.46,58.55 0 bottom
JP145  [PAD-JUMPER-3-2OF3_NC_BY_PASTE_YES_SILK_FULL_BOX]  215.65,51.05 270 bottom
JP146  FIDUCIAL1X2  [FIDUCIAL-1X2]  225.55,58.42 0 top
JP147  FIDUCIAL1X2  [FIDUCIAL-1X2]  243.21,43.81 0 top
JP148  FIDUCIAL1X2  [FIDUCIAL-1X2]  223.01,43.69 0 bottom
JP149  FIDUCIAL1X2  [FIDUCIAL-1X2]  243.33,58.55 0 bottom
JP150  [PAD-JUMPER-3-2OF3_NC_BY_PASTE_YES_SILK_FULL_BOX]  239.52,51.05 270 bottom
JP151  FIDUCIAL1X2  [FIDUCIAL-1X2]  10.67,76.2 0 top
JP152  FIDUCIAL1X2  [FIDUCIAL-1X2]  28.32,61.59 0 top
JP153  FIDUCIAL1X2  [FIDUCIAL-1X2]  8.13,61.47 0 bottom
JP154  FIDUCIAL1X2  [FIDUCIAL-1X2]  28.45,76.33 0 bottom
JP155  [PAD-JUMPER-3-2OF3_NC_BY_PASTE_YES_SILK_FULL_BOX]  24.64,68.83 270 bottom
JP156  FIDUCIAL1X2  [FIDUCIAL-1X2]  34.54,76.2 0 top
JP157  FIDUCIAL1X2  [FIDUCIAL-1X2]  52.2,61.59 0 top
JP158  FIDUCIAL1X2  [FIDUCIAL-1X2]  32,61.47 0 bottom
JP159  FIDUCIAL1X2  [FIDUCIAL-1X2]  52.32,76.33 0 bottom
JP160  [PAD-JUMPER-3-2OF3_NC_BY_PASTE_YES_SILK_FULL_BOX]  48.51,68.83 270 bottom
JP161  FIDUCIAL1X2  [FIDUCIAL-1X2]  58.42,76.2 0 top
JP162  FIDUCIAL1X2  [FIDUCIAL-1X2]  76.07,61.59 0 top
JP163  FIDUCIAL1X2  [FIDUCIAL-1X2]  55.88,61.47 0 bottom
JP164  FIDUCIAL1X2  [FIDUCIAL-1X2]  76.2,76.33 0 bottom
JP165  [PAD-JUMPER-3-2OF3_NC_BY_PASTE_YES_SILK_FULL_BOX]  72.39,68.83 270 bottom
JP166  FIDUCIAL1X2  [FIDUCIAL-1X2]  82.3,76.2 0 top
JP167  FIDUCIAL1X2  [FIDUCIAL-1X2]  99.95,61.59 0 top
JP168  FIDUCIAL1X2  [FIDUCIAL-1X2]  79.76,61.47 0 bottom
JP169  FIDUCIAL1X2  [FIDUCIAL-1X2]  100.08,76.33 0 bottom
JP170  [PAD-JUMPER-3-2OF3_NC_BY_PASTE_YES_SILK_FULL_BOX]  96.27,68.83 270 bottom
JP171  FIDUCIAL1X2  [FIDUCIAL-1X2]  106.17,76.2 0 top
JP172  FIDUCIAL1X2  [FIDUCIAL-1X2]  123.83,61.59 0 top
JP173  FIDUCIAL1X2  [FIDUCIAL-1X2]  103.63,61.47 0 bottom
JP174  FIDUCIAL1X2  [FIDUCIAL-1X2]  123.95,76.33 0 bottom
JP175  [PAD-JUMPER-3-2OF3_NC_BY_PASTE_YES_SILK_FULL_BOX]  120.14,68.83 270 bottom
JP176  FIDUCIAL1X2  [FIDUCIAL-1X2]  130.05,76.2 0 top
JP177  FIDUCIAL1X2  [FIDUCIAL-1X2]  147.7,61.59 0 top
JP178  FIDUCIAL1X2  [FIDUCIAL-1X2]  127.51,61.47 0 bottom
JP179  FIDUCIAL1X2  [FIDUCIAL-1X2]  147.83,76.33 0 bottom
JP180  [PAD-JUMPER-3-2OF3_NC_BY_PASTE_YES_SILK_FULL_BOX]  144.02,68.83 270 bottom
JP181  FIDUCIAL1X2  [FIDUCIAL-1X2]  153.92,76.2 0 top
JP182  FIDUCIAL1X2  [FIDUCIAL-1X2]  171.58,61.59 0 top
JP183  FIDUCIAL1X2  [FIDUCIAL-1X2]  151.38,61.47 0 bottom
JP184  FIDUCIAL1X2  [FIDUCIAL-1X2]  171.7,76.33 0 bottom
JP185  [PAD-JUMPER-3-2OF3_NC_BY_PASTE_YES_SILK_FULL_BOX]  167.89,68.83 270 bottom
JP186  FIDUCIAL1X2  [FIDUCIAL-1X2]  177.8,76.2 0 top
JP187  FIDUCIAL1X2  [FIDUCIAL-1X2]  195.45,61.59 0 top
JP188  FIDUCIAL1X2  [FIDUCIAL-1X2]  175.26,61.47 0 bottom
JP189  FIDUCIAL1X2  [FIDUCIAL-1X2]  195.58,76.33 0 bottom
JP190  [PAD-JUMPER-3-2OF3_NC_BY_PASTE_YES_SILK_FULL_BOX]  191.77,68.83 270 bottom
JP191  FIDUCIAL1X2  [FIDUCIAL-1X2]  201.68,76.2 0 top
JP192  FIDUCIAL1X2  [FIDUCIAL-1X2]  219.33,61.59 0 top
JP193  FIDUCIAL1X2  [FIDUCIAL-1X2]  199.14,61.47 0 bottom
JP194  FIDUCIAL1X2  [FIDUCIAL-1X2]  219.46,76.33 0 bottom
JP195  [PAD-JUMPER-3-2OF3_NC_BY_PASTE_YES_SILK_FULL_BOX]  215.65,68.83 270 bottom
JP196  FIDUCIAL1X2  [FIDUCIAL-1X2]  225.55,76.2 0 top
JP197  FIDUCIAL1X2  [FIDUCIAL-1X2]  243.21,61.59 0 top
JP198  FIDUCIAL1X2  [FIDUCIAL-1X2]  223.01,61.47 0 bottom
JP199  FIDUCIAL1X2  [FIDUCIAL-1X2]  243.33,76.33 0 bottom
JP200  [PAD-JUMPER-3-2OF3_NC_BY_PASTE_YES_SILK_FULL_BOX]  239.52,68.83 270 bottom
JP201  FIDUCIAL1X2  [FIDUCIAL-1X2]  10.67,93.98 0 top
JP202  FIDUCIAL1X2  [FIDUCIAL-1X2]  28.32,79.38 0 top
JP203  FIDUCIAL1X2  [FIDUCIAL-1X2]  8.13,79.25 0 bottom
JP204  FIDUCIAL1X2  [FIDUCIAL-1X2]  28.45,94.11 0 bottom
JP205  [PAD-JUMPER-3-2OF3_NC_BY_PASTE_YES_SILK_FULL_BOX]  24.64,86.61 270 bottom
JP206  FIDUCIAL1X2  [FIDUCIAL-1X2]  34.54,93.98 0 top
JP207  FIDUCIAL1X2  [FIDUCIAL-1X2]  52.2,79.38 0 top
JP208  FIDUCIAL1X2  [FIDUCIAL-1X2]  32,79.25 0 bottom
JP209  FIDUCIAL1X2  [FIDUCIAL-1X2]  52.32,94.11 0 bottom
JP210  [PAD-JUMPER-3-2OF3_NC_BY_PASTE_YES_SILK_FULL_BOX]  48.51,86.61 270 bottom
JP211  FIDUCIAL1X2  [FIDUCIAL-1X2]  58.42,93.98 0 top
JP212  FIDUCIAL1X2  [FIDUCIAL-1X2]  76.07,79.38 0 top
JP213  FIDUCIAL1X2  [FIDUCIAL-1X2]  55.88,79.25 0 bottom
JP214  FIDUCIAL1X2  [FIDUCIAL-1X2]  76.2,94.11 0 bottom
JP215  [PAD-JUMPER-3-2OF3_NC_BY_PASTE_YES_SILK_FULL_BOX]  72.39,86.61 270 bottom
JP216  FIDUCIAL1X2  [FIDUCIAL-1X2]  82.3,93.98 0 top
JP217  FIDUCIAL1X2  [FIDUCIAL-1X2]  99.95,79.38 0 top
JP218  FIDUCIAL1X2  [FIDUCIAL-1X2]  79.76,79.25 0 bottom
JP219  FIDUCIAL1X2  [FIDUCIAL-1X2]  100.08,94.11 0 bottom
JP220  [PAD-JUMPER-3-2OF3_NC_BY_PASTE_YES_SILK_FULL_BOX]  96.27,86.61 270 bottom
JP221  FIDUCIAL1X2  [FIDUCIAL-1X2]  106.17,93.98 0 top
JP222  FIDUCIAL1X2  [FIDUCIAL-1X2]  123.83,79.38 0 top
JP223  FIDUCIAL1X2  [FIDUCIAL-1X2]  103.63,79.25 0 bottom
JP224  FIDUCIAL1X2  [FIDUCIAL-1X2]  123.95,94.11 0 bottom
JP225  [PAD-JUMPER-3-2OF3_NC_BY_PASTE_YES_SILK_FULL_BOX]  120.14,86.61 270 bottom
JP226  FIDUCIAL1X2  [FIDUCIAL-1X2]  130.05,93.98 0 top
JP227  FIDUCIAL1X2  [FIDUCIAL-1X2]  147.7,79.38 0 top
JP228  FIDUCIAL1X2  [FIDUCIAL-1X2]  127.51,79.25 0 bottom
JP229  FIDUCIAL1X2  [FIDUCIAL-1X2]  147.83,94.11 0 bottom
JP230  [PAD-JUMPER-3-2OF3_NC_BY_PASTE_YES_SILK_FULL_BOX]  144.02,86.61 270 bottom
JP231  FIDUCIAL1X2  [FIDUCIAL-1X2]  153.92,93.98 0 top
JP232  FIDUCIAL1X2  [FIDUCIAL-1X2]  171.58,79.38 0 top
JP233  FIDUCIAL1X2  [FIDUCIAL-1X2]  151.38,79.25 0 bottom
JP234  FIDUCIAL1X2  [FIDUCIAL-1X2]  171.7,94.11 0 bottom
JP235  [PAD-JUMPER-3-2OF3_NC_BY_PASTE_YES_SILK_FULL_BOX]  167.89,86.61 270 bottom
JP236  FIDUCIAL1X2  [FIDUCIAL-1X2]  177.8,93.98 0 top
JP237  FIDUCIAL1X2  [FIDUCIAL-1X2]  195.45,79.38 0 top
JP238  FIDUCIAL1X2  [FIDUCIAL-1X2]  175.26,79.25 0 bottom
JP239  FIDUCIAL1X2  [FIDUCIAL-1X2]  195.58,94.11 0 bottom
JP240  [PAD-JUMPER-3-2OF3_NC_BY_PASTE_YES_SILK_FULL_BOX]  191.77,86.61 270 bottom
JP241  FIDUCIAL1X2  [FIDUCIAL-1X2]  201.68,93.98 0 top
JP242  FIDUCIAL1X2  [FIDUCIAL-1X2]  219.33,79.38 0 top
JP243  FIDUCIAL1X2  [FIDUCIAL-1X2]  199.14,79.25 0 bottom
JP244  FIDUCIAL1X2  [FIDUCIAL-1X2]  219.46,94.11 0 bottom
JP245  [PAD-JUMPER-3-2OF3_NC_BY_PASTE_YES_SILK_FULL_BOX]  215.65,86.61 270 bottom
JP246  FIDUCIAL1X2  [FIDUCIAL-1X2]  225.55,93.98 0 top
JP247  FIDUCIAL1X2  [FIDUCIAL-1X2]  243.21,79.38 0 top
JP248  FIDUCIAL1X2  [FIDUCIAL-1X2]  223.01,79.25 0 bottom
JP249  FIDUCIAL1X2  [FIDUCIAL-1X2]  243.33,94.11 0 bottom
JP250  [PAD-JUMPER-3-2OF3_NC_BY_PASTE_YES_SILK_FULL_BOX]  239.52,86.61 270 bottom
LOGO1  OSHW-LOGOS  [OSHW-LOGO-S]  27.81,17.4 270 bottom
LOGO2  SFE_LOGO_FLAME.1_INCH  [SFE_LOGO_FLAME_.1]  29.34,14.73 270 bottom
LOGO3  SFE_LOGO_NAME.1_INCH  [SFE_LOGO_NAME_.1]  15.75,6.73 0 top
LOGO4  OSHW-LOGOS  [OSHW-LOGO-S]  51.69,17.4 270 bottom
LOGO5  SFE_LOGO_NAME.1_INCH  [SFE_LOGO_NAME_.1]  39.62,6.73 0 top
LOGO6  SFE_LOGO_FLAME.1_INCH  [SFE_LOGO_FLAME_.1]  53.21,14.73 270 bottom
LOGO7  OSHW-LOGOS  [OSHW-LOGO-S]  75.56,17.4 270 bottom
LOGO8  SFE_LOGO_NAME.1_INCH  [SFE_LOGO_NAME_.1]  63.5,6.73 0 top
LOGO9  SFE_LOGO_FLAME.1_INCH  [SFE_LOGO_FLAME_.1]  77.09,14.73 270 bottom
LOGO10  OSHW-LOGOS  [OSHW-LOGO-S]  99.44,17.4 270 bottom
LOGO11  SFE_LOGO_NAME.1_INCH  [SFE_LOGO_NAME_.1]  87.38,6.73 0 top
LOGO12  SFE_LOGO_FLAME.1_INCH  [SFE_LOGO_FLAME_.1]  100.97,14.73 270 bottom
LOGO13  OSHW-LOGOS  [OSHW-LOGO-S]  123.32,17.4 270 bottom
LOGO14  SFE_LOGO_NAME.1_INCH  [SFE_LOGO_NAME_.1]  111.25,6.73 0 top
LOGO15  SFE_LOGO_FLAME.1_INCH  [SFE_LOGO_FLAME_.1]  124.84,14.73 270 bottom
LOGO16  OSHW-LOGOS  [OSHW-LOGO-S]  147.19,17.4 270 bottom
LOGO17  SFE_LOGO_NAME.1_INCH  [SFE_LOGO_NAME_.1]  135.13,6.73 0 top
LOGO18  SFE_LOGO_FLAME.1_INCH  [SFE_LOGO_FLAME_.1]  148.72,14.73 270 bottom
LOGO19  OSHW-LOGOS  [OSHW-LOGO-S]  171.07,17.4 270 bottom
LOGO20  SFE_LOGO_NAME.1_INCH  [SFE_LOGO_NAME_.1]  159,6.73 0 top
LOGO21  SFE_LOGO_FLAME.1_INCH  [SFE_LOGO_FLAME_.1]  172.59,14.73 270 bottom
LOGO22  OSHW-LOGOS  [OSHW-LOGO-S]  194.94,17.4 270 bottom
LOGO23  SFE_LOGO_NAME.1_INCH  [SFE_LOGO_NAME_.1]  182.88,6.73 0 top
LOGO24  SFE_LOGO_FLAME.1_INCH  [SFE_LOGO_FLAME_.1]  196.47,14.73 270 bottom
LOGO25  OSHW-LOGOS  [OSHW-LOGO-S]  218.82,17.4 270 bottom
LOGO26  SFE_LOGO_NAME.1_INCH  [SFE_LOGO_NAME_.1]  206.76,6.73 0 top
LOGO27  SFE_LOGO_FLAME.1_INCH  [SFE_LOGO_FLAME_.1]  220.34,14.73 270 bottom
LOGO28  OSHW-LOGOS  [OSHW-LOGO-S]  242.7,17.4 270 bottom
LOGO29  SFE_LOGO_NAME.1_INCH  [SFE_LOGO_NAME_.1]  230.63,6.73 0 top
LOGO30  SFE_LOGO_FLAME.1_INCH  [SFE_LOGO_FLAME_.1]  244.22,14.73 270 bottom
LOGO31  OSHW-LOGOS  [OSHW-LOGO-S]  27.81,35.18 270 bottom
LOGO32  SFE_LOGO_NAME.1_INCH  [SFE_LOGO_NAME_.1]  15.75,24.51 0 top
LOGO33  SFE_LOGO_FLAME.1_INCH  [SFE_LOGO_FLAME_.1]  29.34,32.51 270 bottom
LOGO34  OSHW-LOGOS  [OSHW-LOGO-S]  51.69,35.18 270 bottom
LOGO35  SFE_LOGO_NAME.1_INCH  [SFE_LOGO_NAME_.1]  39.62,24.51 0 top
LOGO36  SFE_LOGO_FLAME.1_INCH  [SFE_LOGO_FLAME_.1]  53.21,32.51 270 bottom
LOGO37  OSHW-LOGOS  [OSHW-LOGO-S]  75.56,35.18 270 bottom
LOGO38  SFE_LOGO_NAME.1_INCH  [SFE_LOGO_NAME_.1]  63.5,24.51 0 top
LOGO39  SFE_LOGO_FLAME.1_INCH  [SFE_LOGO_FLAME_.1]  77.09,32.51 270 bottom
LOGO40  OSHW-LOGOS  [OSHW-LOGO-S]  99.44,35.18 270 bottom
LOGO41  SFE_LOGO_NAME.1_INCH  [SFE_LOGO_NAME_.1]  87.38,24.51 0 top
LOGO42  SFE_LOGO_FLAME.1_INCH  [SFE_LOGO_FLAME_.1]  100.97,32.51 270 bottom
LOGO43  OSHW-LOGOS  [OSHW-LOGO-S]  123.32,35.18 270 bottom
LOGO44  SFE_LOGO_NAME.1_INCH  [SFE_LOGO_NAME_.1]  111.25,24.51 0 top
LOGO45  SFE_LOGO_FLAME.1_INCH  [SFE_LOGO_FLAME_.1]  124.84,32.51 270 bottom
LOGO46  OSHW-LOGOS  [OSHW-LOGO-S]  147.19,35.18 270 bottom
LOGO47  SFE_LOGO_NAME.1_INCH  [SFE_LOGO_NAME_.1]  135.13,24.51 0 top
LOGO48  SFE_LOGO_FLAME.1_INCH  [SFE_LOGO_FLAME_.1]  148.72,32.51 270 bottom
LOGO49  OSHW-LOGOS  [OSHW-LOGO-S]  171.07,35.18 270 bottom
LOGO50  SFE_LOGO_NAME.1_INCH  [SFE_LOGO_NAME_.1]  159,24.51 0 top
LOGO51  SFE_LOGO_FLAME.1_INCH  [SFE_LOGO_FLAME_.1]  172.59,32.51 270 bottom
LOGO52  OSHW-LOGOS  [OSHW-LOGO-S]  194.94,35.18 270 bottom
LOGO53  SFE_LOGO_NAME.1_INCH  [SFE_LOGO_NAME_.1]  182.88,24.51 0 top
LOGO54  SFE_LOGO_FLAME.1_INCH  [SFE_LOGO_FLAME_.1]  196.47,32.51 270 bottom
LOGO55  OSHW-LOGOS  [OSHW-LOGO-S]  218.82,35.18 270 bottom
LOGO56  SFE_LOGO_NAME.1_INCH  [SFE_LOGO_NAME_.1]  206.76,24.51 0 top
LOGO57  SFE_LOGO_FLAME.1_INCH  [SFE_LOGO_FLAME_.1]  220.34,32.51 270 bottom
LOGO58  OSHW-LOGOS  [OSHW-LOGO-S]  242.7,35.18 270 bottom
LOGO59  SFE_LOGO_NAME.1_INCH  [SFE_LOGO_NAME_.1]  230.63,24.51 0 top
LOGO60  SFE_LOGO_FLAME.1_INCH  [SFE_LOGO_FLAME_.1]  244.22,32.51 270 bottom
LOGO61  OSHW-LOGOS  [OSHW-LOGO-S]  27.81,52.96 270 bottom
LOGO62  SFE_LOGO_NAME.1_INCH  [SFE_LOGO_NAME_.1]  15.75,42.29 0 top
LOGO63  SFE_LOGO_FLAME.1_INCH  [SFE_LOGO_FLAME_.1]  29.34,50.29 270 bottom
LOGO64  OSHW-LOGOS  [OSHW-LOGO-S]  51.69,52.96 270 bottom
LOGO65  SFE_LOGO_NAME.1_INCH  [SFE_LOGO_NAME_.1]  39.62,42.29 0 top
LOGO66  SFE_LOGO_FLAME.1_INCH  [SFE_LOGO_FLAME_.1]  53.21,50.29 270 bottom
LOGO67  OSHW-LOGOS  [OSHW-LOGO-S]  75.56,52.96 270 bottom
LOGO68  SFE_LOGO_NAME.1_INCH  [SFE_LOGO_NAME_.1]  63.5,42.29 0 top
LOGO69  SFE_LOGO_FLAME.1_INCH  [SFE_LOGO_FLAME_.1]  77.09,50.29 270 bottom
LOGO70  OSHW-LOGOS  [OSHW-LOGO-S]  99.44,52.96 270 bottom
LOGO71  SFE_LOGO_NAME.1_INCH  [SFE_LOGO_NAME_.1]  87.38,42.29 0 top
LOGO72  SFE_LOGO_FLAME.1_INCH  [SFE_LOGO_FLAME_.1]  100.97,50.29 270 bottom
LOGO73  OSHW-LOGOS  [OSHW-LOGO-S]  123.32,52.96 270 bottom
LOGO74  SFE_LOGO_NAME.1_INCH  [SFE_LOGO_NAME_.1]  111.25,42.29 0 top
LOGO75  SFE_LOGO_FLAME.1_INCH  [SFE_LOGO_FLAME_.1]  124.84,50.29 270 bottom
LOGO76  OSHW-LOGOS  [OSHW-LOGO-S]  147.19,52.96 270 bottom
LOGO77  SFE_LOGO_NAME.1_INCH  [SFE_LOGO_NAME_.1]  135.13,42.29 0 top
LOGO78  SFE_LOGO_FLAME.1_INCH  [SFE_LOGO_FLAME_.1]  148.72,50.29 270 bottom
LOGO79  OSHW-LOGOS  [OSHW-LOGO-S]  171.07,52.96 270 bottom
LOGO80  SFE_LOGO_NAME.1_INCH  [SFE_LOGO_NAME_.1]  159,42.29 0 top
LOGO81  SFE_LOGO_FLAME.1_INCH  [SFE_LOGO_FLAME_.1]  172.59,50.29 270 bottom
LOGO82  OSHW-LOGOS  [OSHW-LOGO-S]  194.94,52.96 270 bottom
LOGO83  SFE_LOGO_NAME.1_INCH  [SFE_LOGO_NAME_.1]  182.88,42.29 0 top
LOGO84  SFE_LOGO_FLAME.1_INCH  [SFE_LOGO_FLAME_.1]  196.47,50.29 270 bottom
LOGO85  OSHW-LOGOS  [OSHW-LOGO-S]  218.82,52.96 270 bottom
LOGO86  SFE_LOGO_NAME.1_INCH  [SFE_LOGO_NAME_.1]  206.76,42.29 0 top
LOGO87  SFE_LOGO_FLAME.1_INCH  [SFE_LOGO_FLAME_.1]  220.34,50.29 270 bottom
LOGO88  OSHW-LOGOS  [OSHW-LOGO-S]  242.7,52.96 270 bottom
LOGO89  SFE_LOGO_NAME.1_INCH  [SFE_LOGO_NAME_.1]  230.63,42.29 0 top
LOGO90  SFE_LOGO_FLAME.1_INCH  [SFE_LOGO_FLAME_.1]  244.22,50.29 270 bottom
LOGO91  OSHW-LOGOS  [OSHW-LOGO-S]  27.81,70.74 270 bottom
LOGO92  SFE_LOGO_NAME.1_INCH  [SFE_LOGO_NAME_.1]  15.75,60.07 0 top
LOGO93  SFE_LOGO_FLAME.1_INCH  [SFE_LOGO_FLAME_.1]  29.34,68.07 270 bottom
LOGO94  OSHW-LOGOS  [OSHW-LOGO-S]  51.69,70.74 270 bottom
LOGO95  SFE_LOGO_NAME.1_INCH  [SFE_LOGO_NAME_.1]  39.62,60.07 0 top
LOGO96  SFE_LOGO_FLAME.1_INCH  [SFE_LOGO_FLAME_.1]  53.21,68.07 270 bottom
LOGO97  OSHW-LOGOS  [OSHW-LOGO-S]  75.56,70.74 270 bottom
LOGO98  SFE_LOGO_NAME.1_INCH  [SFE_LOGO_NAME_.1]  63.5,60.07 0 top
LOGO99  SFE_LOGO_FLAME.1_INCH  [SFE_LOGO_FLAME_.1]  77.09,68.07 270 bottom
LOGO100  OSHW-LOGOS  [OSHW-LOGO-S]  99.44,70.74 270 bottom
LOGO101  SFE_LOGO_NAME.1_INCH  [SFE_LOGO_NAME_.1]  87.38,60.07 0 top
LOGO102  SFE_LOGO_FLAME.1_INCH  [SFE_LOGO_FLAME_.1]  100.97,68.07 270 bottom
LOGO103  OSHW-LOGOS  [OSHW-LOGO-S]  123.32,70.74 270 bottom
LOGO104  SFE_LOGO_NAME.1_INCH  [SFE_LOGO_NAME_.1]  111.25,60.07 0 top
LOGO105  SFE_LOGO_FLAME.1_INCH  [SFE_LOGO_FLAME_.1]  124.84,68.07 270 bottom
LOGO106  OSHW-LOGOS  [OSHW-LOGO-S]  147.19,70.74 270 bottom
LOGO107  SFE_LOGO_NAME.1_INCH  [SFE_LOGO_NAME_.1]  135.13,60.07 0 top
LOGO108  SFE_LOGO_FLAME.1_INCH  [SFE_LOGO_FLAME_.1]  148.72,68.07 270 bottom
LOGO109  OSHW-LOGOS  [OSHW-LOGO-S]  171.07,70.74 270 bottom
LOGO110  SFE_LOGO_NAME.1_INCH  [SFE_LOGO_NAME_.1]  159,60.07 0 top
LOGO111  SFE_LOGO_FLAME.1_INCH  [SFE_LOGO_FLAME_.1]  172.59,68.07 270 bottom
LOGO112  OSHW-LOGOS  [OSHW-LOGO-S]  194.94,70.74 270 bottom
LOGO113  SFE_LOGO_NAME.1_INCH  [SFE_LOGO_NAME_.1]  182.88,60.07 0 top
LOGO114  SFE_LOGO_FLAME.1_INCH  [SFE_LOGO_FLAME_.1]  196.47,68.07 270 bottom
LOGO115  OSHW-LOGOS  [OSHW-LOGO-S]  218.82,70.74 270 bottom
LOGO116  SFE_LOGO_NAME.1_INCH  [SFE_LOGO_NAME_.1]  206.76,60.07 0 top
LOGO117  SFE_LOGO_FLAME.1_INCH  [SFE_LOGO_FLAME_.1]  220.34,68.07 270 bottom
LOGO118  OSHW-LOGOS  [OSHW-LOGO-S]  242.7,70.74 270 bottom
LOGO119  SFE_LOGO_NAME.1_INCH  [SFE_LOGO_NAME_.1]  230.63,60.07 0 top
LOGO120  SFE_LOGO_FLAME.1_INCH  [SFE_LOGO_FLAME_.1]  244.22,68.07 270 bottom
LOGO121  OSHW-LOGOS  [OSHW-LOGO-S]  27.81,88.52 270 bottom
LOGO122  SFE_LOGO_NAME.1_INCH  [SFE_LOGO_NAME_.1]  15.75,77.85 0 top
LOGO123  SFE_LOGO_FLAME.1_INCH  [SFE_LOGO_FLAME_.1]  29.34,85.85 270 bottom
LOGO124  OSHW-LOGOS  [OSHW-LOGO-S]  51.69,88.52 270 bottom
LOGO125  SFE_LOGO_NAME.1_INCH  [SFE_LOGO_NAME_.1]  39.62,77.85 0 top
LOGO126  SFE_LOGO_FLAME.1_INCH  [SFE_LOGO_FLAME_.1]  53.21,85.85 270 bottom
LOGO127  OSHW-LOGOS  [OSHW-LOGO-S]  75.56,88.52 270 bottom
LOGO128  SFE_LOGO_NAME.1_INCH  [SFE_LOGO_NAME_.1]  63.5,77.85 0 top
LOGO129  SFE_LOGO_FLAME.1_INCH  [SFE_LOGO_FLAME_.1]  77.09,85.85 270 bottom
LOGO130  OSHW-LOGOS  [OSHW-LOGO-S]  99.44,88.52 270 bottom
LOGO131  SFE_LOGO_NAME.1_INCH  [SFE_LOGO_NAME_.1]  87.38,77.85 0 top
LOGO132  SFE_LOGO_FLAME.1_INCH  [SFE_LOGO_FLAME_.1]  100.97,85.85 270 bottom
LOGO133  OSHW-LOGOS  [OSHW-LOGO-S]  123.32,88.52 270 bottom
LOGO134  SFE_LOGO_NAME.1_INCH  [SFE_LOGO_NAME_.1]  111.25,77.85 0 top
LOGO135  SFE_LOGO_FLAME.1_INCH  [SFE_LOGO_FLAME_.1]  124.84,85.85 270 bottom
LOGO136  OSHW-LOGOS  [OSHW-LOGO-S]  147.19,88.52 270 bottom
LOGO137  SFE_LOGO_NAME.1_INCH  [SFE_LOGO_NAME_.1]  135.13,77.85 0 top
LOGO138  SFE_LOGO_FLAME.1_INCH  [SFE_LOGO_FLAME_.1]  148.72,85.85 270 bottom
LOGO139  OSHW-LOGOS  [OSHW-LOGO-S]  171.07,88.52 270 bottom
LOGO140  SFE_LOGO_NAME.1_INCH  [SFE_LOGO_NAME_.1]  159,77.85 0 top